# Altium PCB PCB1.PcbDoc
Units mm, origin at the board's own origin, x right, y up, seen from the top; angles counter-clockwise.
Board outline 50 x 20 mm, 4 copper layers (L1, L2, L3, L4), stack 1.564 mm thick; 42 components, 36 nets, 161 pads, 147 vias.
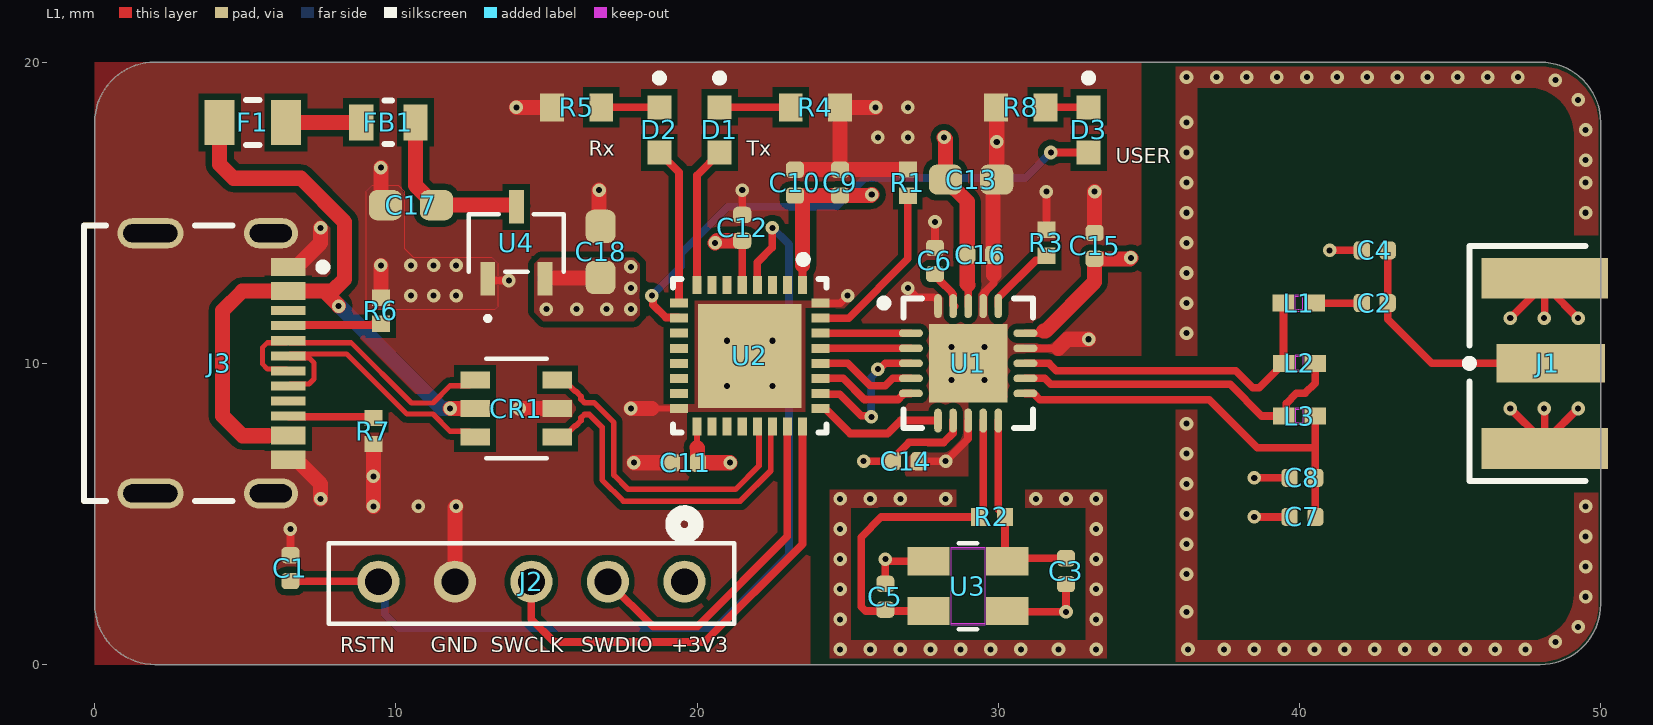
[diagram p0: L1 view]
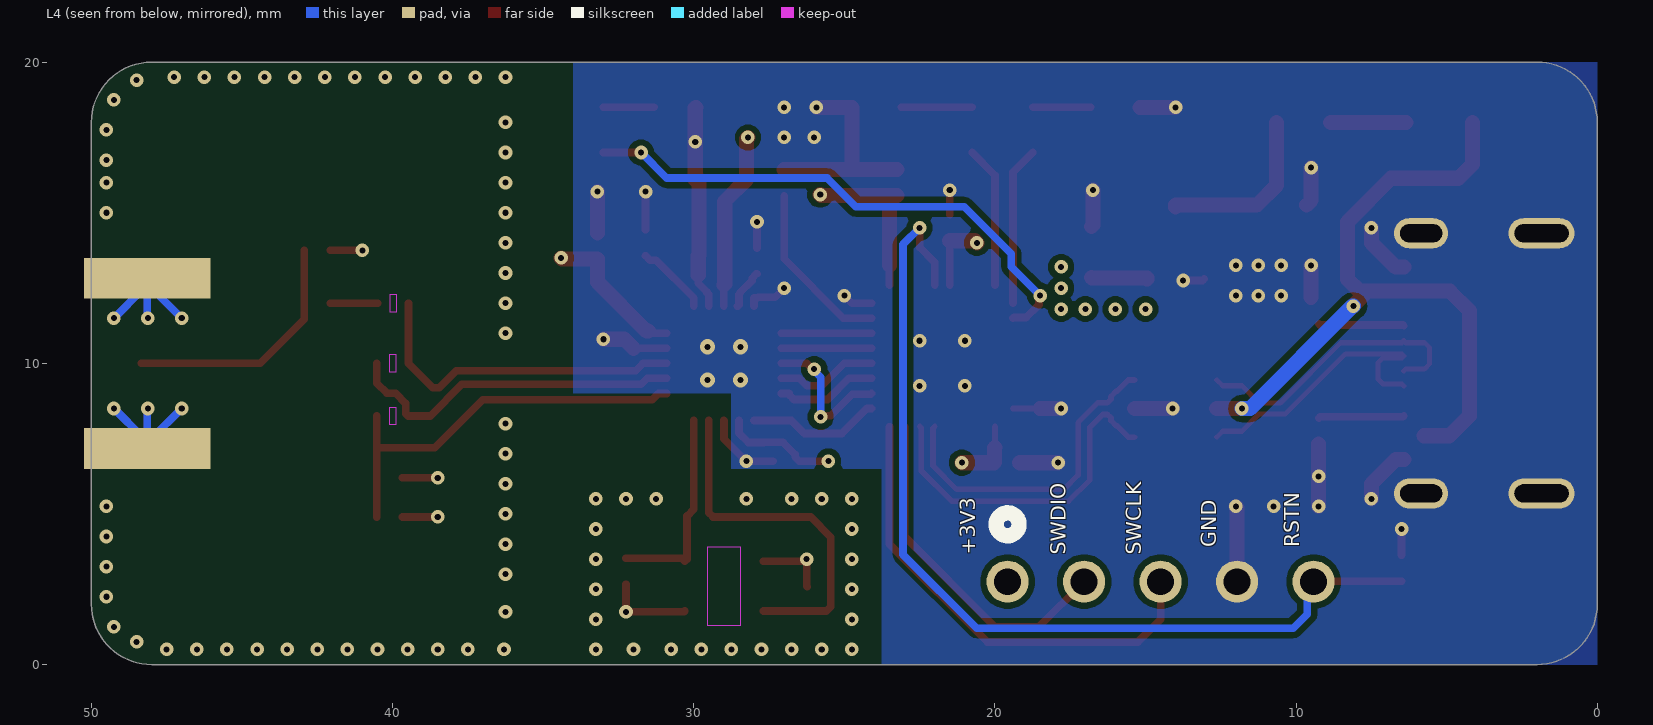
[diagram p1: L4 view, seen from below]
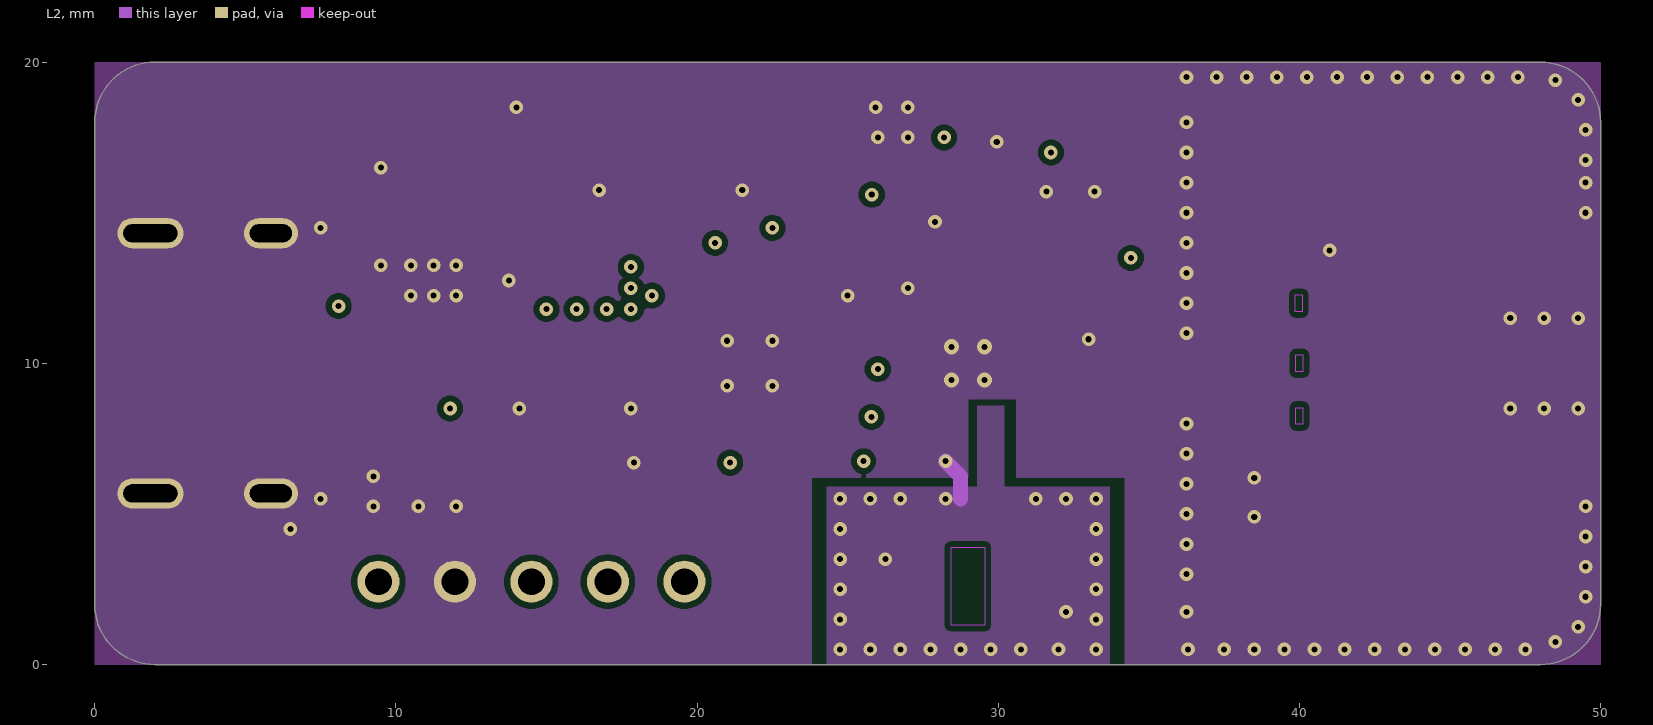
[diagram p2: L2]
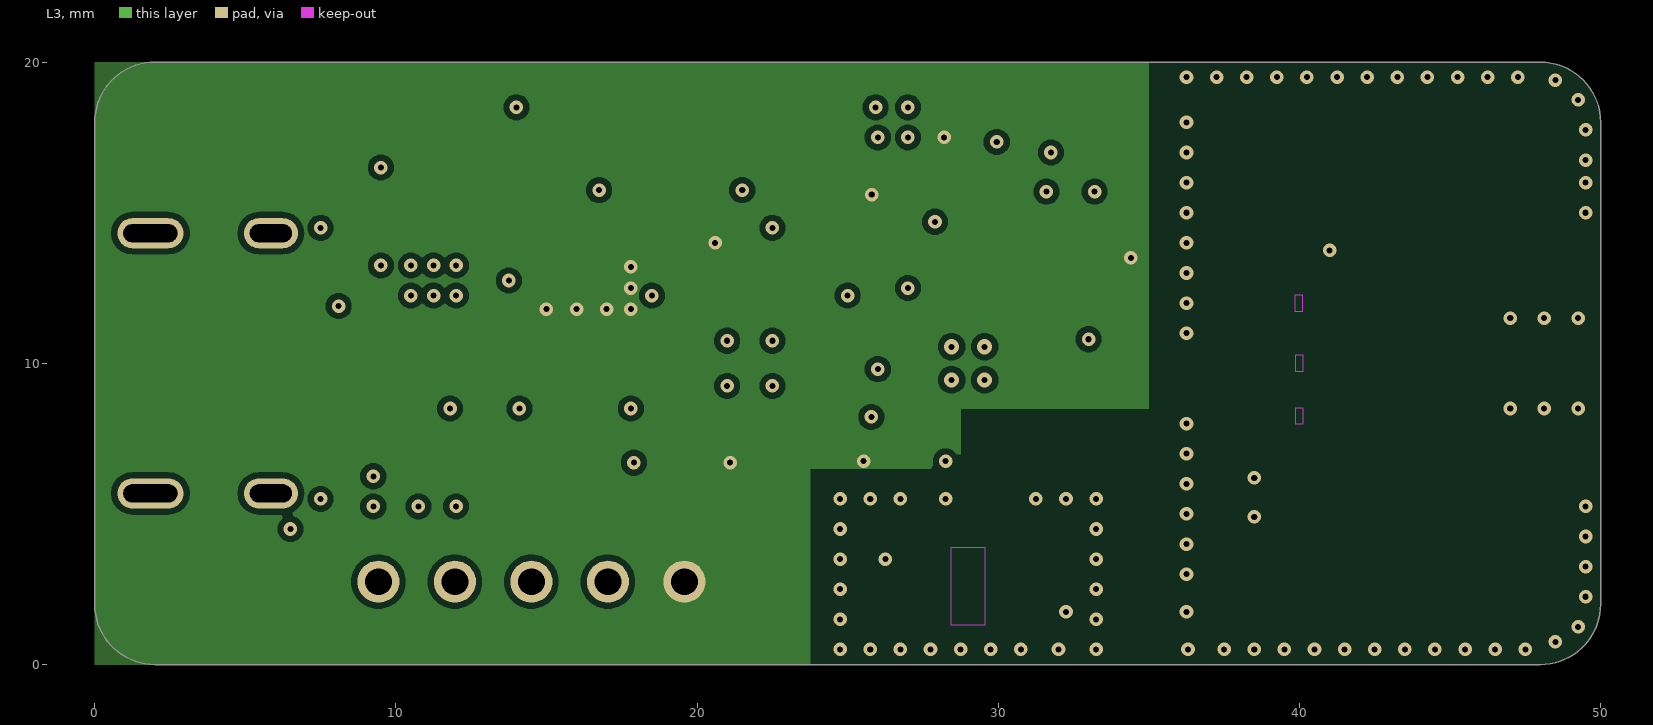
[diagram p3: L3]
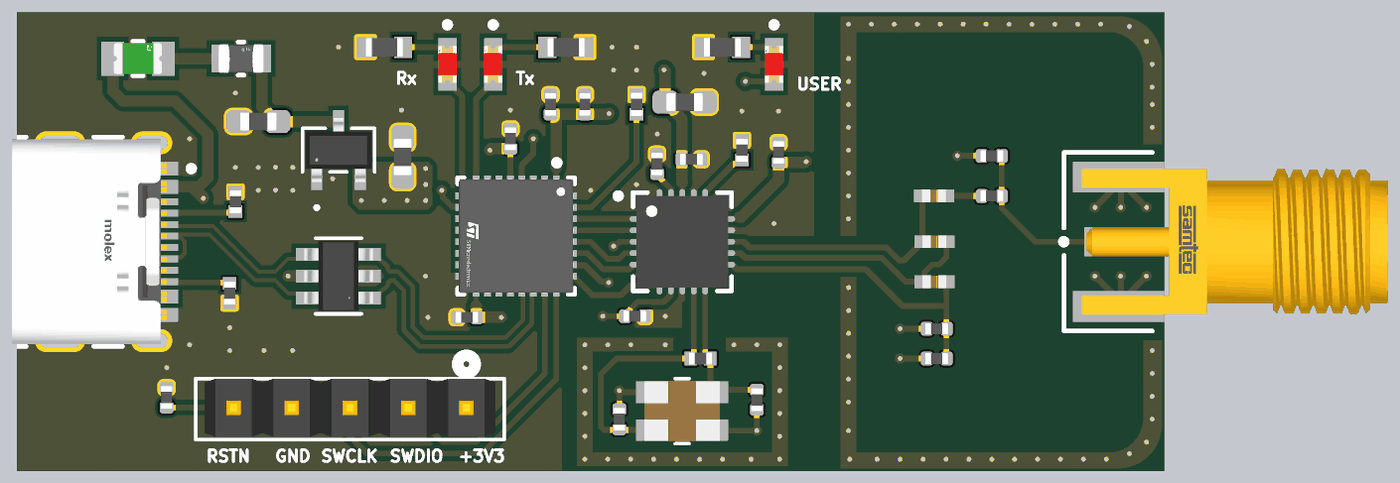
[diagram p4: 3D render of the assembled board from above, using the file's embedded part models]

## Layer stack, top to bottom
Top Solder: solder mask 0.0102, Solder Resist, Dk 3.5
L1: signal copper 0.035
Dielectric 2: prepreg 0.0994, PP-006, Dk 4.1
L2: signal copper 0.0152
Dielectric 1: dielectric 1.265, FR-4, Dk 4.5
L3: signal copper 0.0152
Dielectric 3: prepreg 0.0994, PP-006, Dk 4.1
L4: signal copper 0.035
Bottom Solder: solder mask 0.0102, Solder Resist, Dk 3.5

## Board outline
2,0 cw(c2,2) 0,2 0,18 cw(c2,18) 2,20 48,20 cw(c48,18) 50,18 50,2 cw(c48,2) 48,0

## Design rules (kind name [scope] priority, off if disabled: settings)
Clearance [All] p1: gap=0.2 ignorepadtopadclearanceinfootprint=FALSE
DiffPairsRouting DiffPairsRouting_90R [InDifferentialPair('USB_CONN_D') OR InDifferentialPair('USB_D')] p1: maxlimit=0.22 minlimit=0.18 mostfreqgap=0.2 toplayer_minwidth=0.14 toplayer_maxwidth=0.19 toplayer_prefwidth=0.169 midlayer1_minwidth=0.14 midlayer1_maxwidth=0.19 midlayer1_prefwidth=0.169 midlayer2_minwidth=0.14 midlayer2_maxwidth=0.19 midlayer2_prefwidth=0.169 bottomlayer_minwidth=0.14 bottomlayer_maxwidth=0.19 bottomlayer_prefwidth=0.169 maxuncoupledlength=12.7
DiffPairsRouting [All] p2: maxlimit=0.254 minlimit=0.254 mostfreqgap=0.254 toplayer_minwidth=0.381 toplayer_maxwidth=0.381 toplayer_prefwidth=0.381 midlayer1_minwidth=0.381 midlayer1_maxwidth=0.381 midlayer1_prefwidth=0.381 midlayer2_minwidth=0.381 midlayer2_maxwidth=0.381 midlayer2_prefwidth=0.381 bottomlayer_minwidth=0.381 bottomlayer_maxwidth=0.381 bottomlayer_prefwidth=0.381 maxuncoupledlength=12.7
MinimumSolderMaskSliver [All] p1: minsoldermaskwidth=0.1
PolygonConnect [All] p1: connectstyle=Direct reliefconductorwidth=0.254 reliefentries=4 polygonreliefangle="90 Angle" airgapwidth=0.254
RoutingVias [All] p1: holewidth=0.2 width=0.45 viastyle="Through Hole" minholewidth=0.2 minwidth=0.45 maxholewidth=0.2 maxwidth=0.45
SolderMaskExpansion [All] p1: expansion=0.102 istentingtop=FALSE
Width [All] p1: maxlimit=0.5 minlimit=0.15 preferedwidth=0.254 minimp=50.000000 maximp=50.000000 favimp=50.000000
28 further rules are at their usual default settings.

## Classes and differential pairs
differential pair USB_D: +USB_D_P -USB_D_N
differential pair USB_CONN_D: +USB_CONN_D_P -USB_CONN_D_N

## Components (designator, comment, footprint, x,y, rotation, side; value= is the part's Value field where it differs from the comment)
C1 "100nF" CAPC1005X55N 6.5,3.2 r90 top
C2 "1.5pF" CAPC1005X55N 42.5,12 r0 top
C3 "12pF" CAPC1005X55N 32.25,3.1 r270 top
C4 "1.0pF" CAPC1005X55N 42.5,13.75 r0 top
C5 "12pF" CAPC1005X55N 26.25,2.25 r90 top
C6 "33nF" CAPC1005X55N 27.9,13.4 r270 top
C7 "2.2nF" CAPC1005X55N 40.1,4.9 r0 top
C8 "4.7pF" CAPC1005X55N 40.1,6.2 r0 top
C9 "1uF" CAPC1005X55N 24.75,16 r270 top
C10 "100nF" CAPC1005X55N 23.25,16 r270 top
C11 "100nF" CAPC1005X55N 19.6,6.7 r0 top
C12 "100nF" CAPC1005X55N 21.5,14.5 r270 top
C13 "10uF" CAPC1608X90 29.1,16.1 r180 top
C14 "10nF" CAPC1005X55N 26.93,6.75 r180 top
C15 "10nF" CAPC1005X55N 33.2,13.9 r270 top
C16 "10nF" CAPC1005X55N 29.4,13.6 r180 top
C17 "10uF" CAPC1608X90 10.5,15.25 r0 top
C18 "10uF" CAPC1608X90 16.8,13.7 r270 top
CR1 "USBLC6-2SC6" SOT23-6L_STM 14,8.5 r180 top
D1 "SML-LX0603IW-TR" FP-SML-LX0603IW-TR-MFG 20.75,17.75 r270 top
D2 "SML-LX0603IW-TR" FP-SML-LX0603IW-TR-MFG 18.75,17.75 r270 top
D3 "SML-LX0603IW-TR" FP-SML-LX0603IW-TR-MFG 33,17.75 r270 top
F1 "0805L010YR" FP-0805L010-MFG 5.25,18 r0 top
FB1 "MPZ2012S101AT000" FP-MPZ2012-MFG 9.75,18 r0 top
J1 "SMA-J-P-H-ST-EM1" FP-SMA-J-P-H-ST-EM1-MFG 55,10 r90 top
J2 "TSW-105-07-G-S" CON5_1X5_TU_TSW 14.5,2.75 r180 top
J3 "217179-0001" FP-2171790001-MFG 3,10 r270 top locked
L1 "3.9nH" IND_LQG15HS3N3S02D_MUR 39.979,12 r180 top
L2 "8.2nH" IND_LQG15HS3N3S02D_MUR 40,10 r180 top
L3 "2.7nH" IND_LQG15HS3N3S02D_MUR 40,8.25 r180 top
R1 "10K" RESC1005X37N 27,16 r90 top
R2 "1M" RESC1005X37N 29.791,4.9 r0 top
R3 "22K" RESC1005X37N 31.6,14 r270 top
R4 "1K" RESC1608X55N 23.93,18.5 r180 top
R5 "1K" RESC1608X55N 16,18.5 r0 top
R6 "5K1" RESC1005X37N 9.5,11.75 r90 top
R7 "5K1" RESC1005X37N 9.25,7.75 r270 top
R8 "1K" RESC1608X55N 30.75,18.5 r0 top
U1 "NRF24L01P-T" NRSC-QFN-20_N 29,10 r0 top
U2 "STM32L432KBU6" FP-UFQFPN32-A0B8-MFG 21.75,10.25 r270 top
U3 "X322516MLB4SI  16MHz" CHIP_X32B4SI_SYX 28.991,2.6 r180 top
U4 "XC6206P332MR-G" SOT-23_TOR 14,14 r0 top

## Footprints (in the part's own frame and the unit in brackets; to place one, negate y for a bottom-side part, rotate by r counter-clockwise, add the part's x,y. Pads: shape width x height; smd on the part's side, far side on the other; paste and mask are expansions set on the pad)
CAPC1005X55N [mm]
  rrect53% 0.54x0.6 smd paste+0 mask+0.102: 1(-0.43,0) 2(0.43,0)
  body extent -0.5,-0.25 0.5,0.25, height 0.55
CAPC1608X90 [mm]
  rrect53% 1.1x1 smd: 1(-0.85,0) 2(0.85,0)
  body extent -0.8,-0.4 0.8,0.4, height 0.9
CHIP_X32B4SI_SYX [mil]
  rect 55x37 smd paste+0 mask+0: 1(-51.5,-32.48) 2(51.5,-32.48) 3(51.5,32.48) 4(-51.5,32.48)
  L1 keep-out region: -22,-49 -22,49 22,49 22,-49
  Keep-Out Layer region: -22,-51 -22,51 22,51 22,-51
  silkscreen extent -12,-56 12,56, body extent -65,-52 65,52, height 32
CON5_1X5_TU_TSW [mil]
  round 55 hole 35 paste-27.5 mask+0: 1(-200,0) 2(-100,0) 3(0,0) 4(100,0) 5(200,0)
  silkscreen extent -265,-90 265,55, body extent -250,-50 250,50, height 500
FP-0805L010-MFG [mm]
  rect 1x1.5 smd paste+0 mask+0: 1(-1.1,0) 2(1.1,0)
  silkscreen extent -0.23,-0.75 0.23,0.75, body extent -1.7,-0.85 1.7,0.85, height 0.25
FP-2171790001-MFG [mm]
  rrect100% 1x1.8 hole 1.4 slot 0.6 at 0 deg paste-1000 mask+0: 1(-4.32,2.85) 2(4.32,2.85)
  rrect100% 1x2.2 hole 1.8 slot 0.6 at 0 deg paste-1000 mask+0: 3(-4.32,-1.15) 4(4.32,-1.15)
  rect 0.6x1.15 smd paste+0 mask+0: A1-B12(-3.2,3.425) A4-B9(-2.4,3.425) B1-A12(3.2,3.425) B4-A9(2.4,3.425)
  rect 0.3x1.15 smd paste+0 mask+0: A5(-1.25,3.425) A6(-0.25,3.425) A7(0.25,3.425) A8(1.25,3.425) B5(1.75,3.425) B6(0.75,3.425) B7(-0.75,3.425) B8(-1.75,3.425)
  silkscreen extent -4.57,-3.35 4.57,4.7, body extent -4.92,-3.45 4.92,4.1, height 0.25
FP-MPZ2012-MFG [mm]
  rect 0.8x1.2 smd paste+0 mask+0: 1(-0.9,0) 2(0.9,0)
  silkscreen extent -0.13,-0.72 0.13,0.72, body extent -1.4,-0.82 1.4,0.82, height 0.25
FP-SMA-J-P-H-ST-EM1-MFG [mm]
  rect 1.27x3.6 smd paste+0 mask+0: 1(0,6.66)
  rect 1.35x4.2 smd paste+0 mask+0: 2(-2.825,6.86) 3(2.825,6.86)
  rect 1.35x4.2 smd far side paste+0 mask+0: 4(-2.825,6.86) 5(2.825,6.86)
  silkscreen extent -3.9,5.5 3.9,9.48, body extent -3.6,-4.92 3.6,9.06, height 0.25
FP-SML-LX0603IW-TR-MFG [mm]
  rect 0.8x0.8 smd paste+0 mask+0: 1(-0.75,0) 2(0.75,0)
  silkscreen extent -1.85,-0.12 -1.6,0.13, body extent -1.25,-0.63 1.25,0.63, height 0.25
FP-UFQFPN32-A0B8-MFG [mm]
  rect 0.6x0.3 smd paste+0 mask+0: 1(-2.35,1.75) 2(-2.35,1.25) 3(-2.35,0.75) 4(-2.35,0.25) 5(-2.35,-0.25) 6(-2.35,-0.75) 7(-2.35,-1.25) 8(-2.35,-1.75) 17(2.35,-1.75) 18(2.35,-1.25) 19(2.35,-0.75) 20(2.35,-0.25) 21(2.35,0.25) 22(2.35,0.75) 23(2.35,1.25) 24(2.35,1.75)
  rect 0.3x0.6 smd paste+0 mask+0: 9(-1.75,-2.35) 10(-1.25,-2.35) 11(-0.75,-2.35) 12(-0.25,-2.35) 13(0.25,-2.35) 14(0.75,-2.35) 15(1.25,-2.35) 16(1.75,-2.35) 25(1.75,2.35) 26(1.25,2.35) 27(0.75,2.35) 28(0.25,2.35) 29(-0.25,2.35) 30(-0.75,2.35) 31(-1.25,2.35) 32(-1.75,2.35)
  rect 3.45x3.45 smd paste+0 mask+0: 33(0,0)
  silkscreen extent -3.32,-2.55 2.55,2.55, body extent -2.75,-2.75 2.75,2.75, height 0.25
IND_LQG15HS3N3S02D_MUR [mil]
  rect 28x22 smd paste+0 mask+0: 1(-20.5,0) 2(20.5,0)
  L1 keep-out region: -4.5,-9 -4.5,9 4.5,9 4.5,-9
  Keep-Out Layer region: -4.5,-11 -4.5,11 4.5,11 4.5,-11
  body extent -21,-11 21,11, height 22
NRSC-QFN-20_N [mm] "QFN, 20-Leads, Body 4x4mm, Pitch 0.5mm, Thermal Pad 2.6x2.6mm, IPC Medium Density"
  oval 0.8x0.25 smd mask-0.005: 1(-1.9,1) 2(-1.9,0.5) 3(-1.9,0) 4(-1.9,-0.5) 5(-1.9,-1) 11(1.9,-1) 12(1.9,-0.5) 13(1.9,0) 14(1.9,0.5) 15(1.9,1)
  oval 0.25x0.8 smd mask-0.005: 6(-1,-1.9) 7(-0.5,-1.9) 8(0,-1.9) 9(0.5,-1.9) 10(1,-1.9) 16(1,1.9) 17(0.5,1.9) 18(0,1.9) 19(-0.5,1.9) 20(-1,1.9)
  rect 2.6x2.6 smd: 21(0,0)
  silkscreen extent -2.92,-2.15 2.15,2.15, body extent -2,-2 2,2, height 0.95
RESC1005X37N [mm]
  rect 0.54x0.6 smd paste+0 mask+0.102: 1(-0.432,0) 2(0.432,0)
  body extent -0.5,-0.25 0.5,0.25, height 0.37
RESC1608X55N [mm]
  rect 0.79x0.93 smd paste+0 mask+0.102: 1(-0.82,0) 2(0.82,0)
  body extent -0.8,-0.4 0.8,0.4, height 0.55
SOT23-6L_STM [mil]
  rect 38.5x22 smd paste+0 mask+0: 1(-53.75,37.4) 2(-53.75,0) 3(-53.75,-37.4) 4(53.75,-37.4) 5(53.75,0) 6(53.75,37.4)
  silkscreen extent -40,-65 40,65, body extent -59,-60 59,60, height 57
SOT-23_TOR [mil]
  rect 19.36x43.56 smd paste+0 mask+0: 1(-37.4,-47) 2(37.4,-47) 3(0,47)
  silkscreen extent -62,-102 62,38, body extent -57,-55 57,55, height 51

## Part data
C1 C10 C11 C12: library part CAP-0402-100NF, "Chip Capacitor, 100 nF", Case Size/Dimension=0402, LCSC Part #=C1525, Capacitance=100nF
C2: library part CAP-0402-1P5F, "Chip Capacitor, 1.5 pF", Capacitance=1P5F, Case Size/Dimension=0402, LCSC Part #=C76901
C3 C5: library part CAP-0402-12PF, "Chip Capacitor, 12 pF", Case Size/Dimension=0402, LCSC Part #=C2235030, Capacitance=12pF
C4: library part CAP-0402-1PF, "Chip Capacitor, 1.0 pF", Capacitance=1pF, Case Size/Dimension=0402, LCSC Part #=C76898
C6: library part CAP-0402-33NF, "Chip Capacitor, 33 nF", Case Size/Dimension=0402, LCSC Part #=C126535, Capacitance=33nF
C7: library part CAP-0402-2N2F, "Chip Capacitor, 2.2 nF", Capacitance=2N2F, Case Size/Dimension=0402, LCSC Part #=C2987940
C8: library part CAP-0402-4P7F, "Chip Capacitor, 4.7 pF", Capacitance=4P7F, Case Size/Dimension=0402, LCSC Part #=C161327
C9: library part CAP-0402-1UF, "Chip Capacitor, 1 uF", Case Size/Dimension=0402, LCSC Part #=C52923, Capacitance=1uF
C13 C17 C18: library part CAP-0603-10UF, "Chip Capacitor, 10 uF", Case Size/Dimension=0603, LCSC Part #=C22418930, Capacitance=10uF
C14 C15 C16: library part CAP-0402-10NF, "Chip Capacitor, 10 nF", Case Size/Dimension=0402, LCSC Part #=C15195, Capacitance=10nF
CR1: "ESD Protection for USB 2.0 High Speed", LCSC Part #=C5261088, Manufacturer_Name=STMicroelectronics, Copyright="Copyright (C) 2025 Ultra Librarian. All rights reserved.", Manufacturer_Part_Number=USBLC6-2SC6, RefDes=RefDes
D1 D2 D3: "LED RED DIFFUSED SMD", Case Code (Imperial)=0603, Case Code (Metric)=1608, Color=Red, Forward Current=20mA, Forward Voltage=2V, LCSC Part #=C5354817, Lens Color=White, Max Operating Temperature=85°C, Min Operating Temperature=-25°C, Package Quantity=1, Power Dissipation=50mW, Approvals=UL, Case/Package=0603, Diameter=0.061inch, Dominant Wavelength=635nm, Height=0.6mm, Illumination Color=Red, Lead Free="Lead Free", Length=1.6mm, Lens Style=Diffused, Lens Transparency=Diffused, Luminous Intensity=14mcd, Mount="Surface Mount", Number of LEDs=1, Number of Pins=2, Packaging="Tape and Reel", RoHS Compliant=Yes, Test Current=20mA, Viewing Angle=160°, Wavelength=635nm, Width=0.8mm
F1: "0805L010YR PTC Resettable Fuse 0.1A(hold) 0.3A(trip) 15VDC 100A 0.5W 1.5s 1Ohm SMD Solder Pad 0805 T/R", Ambient Temperature Range High=85°C, Case Code (Imperial)=0805, Case Code (Metric)=2012, Current Rating=100A, Hold Current=100mA, LCSC Part #=C207020, Max Power Dissipation=500mW, Max Voltage Rating (DC)=15V, Maximum Resistance 1 Hour (R1max)=6Ω, Min Operating Temperature=-40°C, Minimum Resistance Initial (Rmin)=1Ω, Trip Current=300mA, Approvals="TUV, cULus", Case/Package=0805, Height=1mm, Lead Free="Lead Free", Length=2.2mm, Lifecycle Status=Production, Max Current Rating=100A, Max Operating Temperature=85°C, Mount="Surface Mount", NexarPartId=673855, Operating Supply Voltage=15V, Packaging="Cut Tape", Power Dissipation=500mW, REACH SVHC="No SVHC", Resistance=6Ω, RoHS=Compliant, Terminal Material=Copper, Termination=SMD/SMT, Time to Trip=1.5s, Voltage Rating=15V, Voltage Rating (DC)=15V, Width=1.5mm, Working Voltage=15V
FB1: "FERRITE BEAD 100 OHM 0805 1LN", Case Code (Imperial)=0805, Case Code (Metric)=2012, Current Rating=4A, DC Resistance (DCR)=20mR, LCSC Part #=C15957, Max Operating Temperature=125°C, Min Operating Temperature=-55°C, Package Quantity=4000, Test Frequency=100MHz, Tolerance=25%, Case/Package=0805, Height=0.041inch, Impedance=100R, Lead Free="Lead Free", Length=0.079inch, Max DC Current=4A, Mount="Surface Mount", Packaging="Tape and Reel", REACH SVHC="No SVHC", RoHS Compliant=Yes, Termination=SMD/SMT, Weight=0.000194oz, Width=0.049inch
J1: "CONN SMA JACK STR 50OHM EDGE MNT", Case/Package=SMA, Dielectric Material=PTFE, Housing Color=Gold, LCSC Part #=C5199907, Max Frequency=6GHz, Max Operating Temperature=125°C, Min Operating Temperature=-65°C, Package Quantity=1, Voltage Rating=335V, Body Material=Brass, Body Plating=Gold, Center Contact Plating=Gold, Connector Type=SMA, Contact Material=Copper, Contact Plating=Gold, Depth=13.33mm, Fastening Type=Threaded, Impedance=50R, Insulation Material=Polytetrafluoroethylene, Length=6.35mm, Mount=Edge, Orientation=Straight, Packaging=Tray, Radiation Hardening=No, RoHS Compliant=Yes, Series=SMA, Termination=Solder
J2: "Conn Unshrouded Header HDR 5 POS 2.54mm Solder ST Top Entry Thru-Hole Bag", LCSC Part #=C5993812, Manufacturer_Name="Samtec Inc", Copyright="Copyright (C) 2025 Ultra Librarian. All rights reserved.", Manufacturer_Part_Number=TSW-105-07-G-S, RefDes=RefDes, Type=Type
J3: "CONN RCP USB2.0 TYP C 24P SMD RA", Current Rating=1.25A, LCSC Part #=C3197684, Max Operating Temperature=85°C, Min Operating Temperature=-40°C, Voltage Rating=30V, Contact Material="Gold, Nickel", Gender=Receptacle, Height=3.36mm, NexarPartId=117190526, Number of Contacts=16, USB Standard="USB 2.0"
L1: library part "IND SMD 3.9nH", "Inductor SMD", LCSC Part #=C77109, Copyright="Copyright (C) 2026 Ultra Librarian. All rights reserved."
L2: library part "IND SMD 8.2nH", "Inductor SMD", LCSC Part #=C98003, Copyright="Copyright (C) 2026 Ultra Librarian. All rights reserved."
L3: library part "IND SMD 2.7nH", "Inductor SMD", LCSC Part #=C77108, Copyright="Copyright (C) 2026 Ultra Librarian. All rights reserved."
R1: library part RES-0402-10K, "RES 10kΩ ±1% 62.5mW 0402", Case/Package=0402, LCSC Part #=C60490, Resistance=10kR, Composition="Thin Film"
R2: library part RES-0402-1M, "RES 1MΩ ±1% 62.5mW 0402", Case/Package=0402, LCSC Part #=C2906900, Resistance=1MR, Composition="Thin Film"
R3: library part RES-0402-22K, "RES 22kΩ ±1% 62.5mW 0402", Case/Package=0402, LCSC Part #=C82868, Resistance=22kR, Composition="Thin Film"
R4 R5 R8: library part RES-0603-1K, "RES 1KΩ ±1% 62.5mW 0603", Case/Package=0603, LCSC Part #=C2907002, Resistance=1KR, Composition="Thin Film"
R6 R7: library part RES-0402-5K1, "RES 5K1Ω ±1% 62.5mW 0402", Case/Package=0402, LCSC Part #=C723526, Resistance=5K1R, Composition="Thin Film"
U1: "Single Chip Transceiver, 2.4 GHz, 60 mW, 1.9 to 3.6 V, -40 to 85 degC, 20-Pin QFN, RoHS, Tray", Current - Receiving=12.6mA~13.5mA, Current - Transmitting=7mA~11.3mA, Frequency=2.4GHz, LCSC Part #=C1526140, Manufacturer="Nordic Semiconductor", Operating Temperature=-40°C~85°C, Package / Case=20-VFQFNExposedPad, Package Description="20-Pin Quad Flat No-lead Package, Body 4 x 4 mm, Pitch 0.5 mm", Package Reference=QFN20, Power - Output=0dBm, Standard Package=490, Voltage - Supply=1.9V~3.6V, Category=RF/IFandRFID, Data Rate (Max)=2Mbps, Datasheet URL=http://www.nordicsemi.com/eng/content/download/2726/34069/file/nRF24L01P_Product_Specification_1_0.pdf, Datasheet Version="Rev. 1.0, 09/2008", Design Resources=DevelopmentToolSelector, Family=RFTransceiverICs, For Use With=1490-1002-ND-KITEVALUATIONNRF24L01P1568-1295-ND-SPARKFUNTRANSCEIVERBREAKOUT-1568-1296-ND-SPARKFUNTRANSCEIVERBREAKOUT-1471-1410-ND-DEVBOARDNRFSCLICKNRF24L01P-MODULE-PCB-ND-KITEVALNRF24L01+PCBANTENNANRF24L01P-MODULE-SMA-ND-KITEVALNRF24L01+SMACONNNRF24L01P-UPGRADE-ND-UPGRADE2PCB/1SMANRF24L01103990038-ND-DEVDUINOSENSORNODEV1.3103990053-ND-DEVDUINOSENSORNODEV2(ATMEGA103990074-ND-DEVDUINOSENSORNODE106990026-ND-ENERGYMONITORSHIELDV2113990088-ND-WIRELESSGATESHIELD113990095-ND-DEVDUINOSENSORNODEV3(ATMEGA106030001-ND-ENERGYMONITORSHIELD1597-1361-ND-DEVDUINOSENSORNODEV2.2(ATMEG105990030-ND-RGBWSTRIPWIRELESSSHIELDV1.0, GPIO=-, Manufacturer URL=http://www.nordicsemi.com/eng/Products/, Memory Size=-, Modulation=GFSK, Mounting Technology=SurfaceMount, Online Catalog=nRF24L01+, Other Names=1490-1019, Packaging=Tray, Protocol=-, RF Family/Standard=GeneralISM>1GHZ, Sensitivity=-94dBm, Serial Interfaces=SPI, Series=-, Type=TxRxOnly
U2: "IC MCU 32BIT 128KB FLASH 32QFPN", Ambient Temperature Range High=+85°C, Ambient Temperature Range Low=-40°C, Frequency=80MHz, LCSC Part #=C94784, Manufacturer=STMicroelectronics, Max Junction Temp=+105°C, Max Supply Voltage=3.6V, Min Supply Voltage=1.62V, Package=UFQFPN32-A0B8, Temperature="-40°C to +85°C", Automotive=No, Category=IC, ComponentLink2Description=Datasheet, ComponentLink2URL=https://www.st.com/resource/en/datasheet/stm32l432kb.pdf, Core Architecture="ARM Cortex-M4", Data Bus Width=32bits, Device Class L1="Integrated Circuits (ICs)", Device Class L2="Embedded Processors and Controllers", Device Class L3=Microcontrollers, Digikey Description="IC MCU 32BIT 128KB FLASH 32QFPN", Height=0.6mm, Interface=I2C,SPI,UART,USART,USB,IrDA, Ipc Land Pattern Name=QFN50P500X500X55-32, Lead Free=Yes, Manufacturer Part Number=STM32L432KBU6, Memory Size=128KBytes, Memory Type=FLASH, Number Of A/D Converters=1, Number Of Adc Channels=10, Number Of Cores=1, Number Of I2C Channels=2, Number of I/Os=26, Number Of Spi Channels=2, Number Of Timers/Counters=8, Number Of Uart Channels=1, Octopart=https://octopart.com/stm32l432kbu6-stmicroelectronics-74568735, RAM Size=64KBytes, RoHS=TRUE, Temperature Range High=+85°C, Temperature Range Low=-40°C
U3: library part X322516MLB4SI, "CRYSTAL 16MHz 9pF SMD", LCSC Part #=C13738, Manufacturer_Name="Shenzhen Yang Xing Technology", Copyright="Copyright (C) 2025 Ultra Librarian. All rights reserved.", Manufacturer_Part_Number=X322516MLB4SI, RefDes=RefDes, Type=Type
U4: "Low ESR Cap. Compatible Positive Voltage Regulators", LCSC Part #=C5446, Manufacturer_Name="Torex Semiconductor", Copyright="Copyright (C) 2026 Ultra Librarian. All rights reserved.", Manufacturer_Part_Number=XC6206P332MR-G, RefDes=RefDes, Type=Type

## Via types
v1: diameter 0.45, hole 0.2, L1 to L4, tented both sides, 143 vias
v2: diameter 0.5, hole 0.2, L1 to L4, 4 vias

## Nets (pads, with @x,y where several pads share a name; then routed paths per layer and width w, separated by ;. In a path a pad name is that pad's centre, name@x,y a point inside that pad or via, vN(x,y) a via of type N, cw(c..) or ccw(c..) an arc to the next point about the centre after c; other vN are vias at no path point)
+3V3: C9.2 C10.2 C11.2 C12.2 C13.2 C14.2 C15.2 C16.2 C18.2 J2.1 U1.7 U1.15 U1.18 U2.1 U2.5 U2.17 U4.2 | length 26.5
  L1 w0.2: 20,7.2 U2.17
  L1 w0.254: U2.5 C12.2 ; U2.1 23.5,13.25 ; v1(25.53,6.75) C14.2 26.633,6.883 26.633,6.972 27.038,7.377 27.682,7.377 27.686,7.373 28.187,7.373 28.498,7.684 28.498,8.098 U1.7 ; U1.18 29,12.6 ; U1.15 31.425,11 31.5,11.075
  L1 w0.5: U4.2 14.95,12.824 14.954,12.828 16.778,12.828 C18.2 ; 20,7.2 20.01,7.19 20.01,6.72 C11.2 v1(21.1,6.7) ; v1(20.6,14) 20.67,14.07 C12.2 ; C10.2 C9.2 25.77,15.57 v1(25.8,15.6) ; 23.5,13.25 23.5,15.32 ; v1(28.2,17.5) 28.25,17.45 C13.2 28.97,15.38 C16.2 ; C16.2@28.97,13.55 28.97,12.63 29,12.6 ; 31.5,11.075 31.575,11.075 33.2,12.7 C15.2 34.37,13.47 v1(34.4,13.5)
  other v1: 15,11.8 16,11.8 17,11.8 17.8,11.8 17.8,12.5 17.8,13.2
+5V: CR1.5 F1.1 J3.A4-B9 J3.B4-A9 | length 24.6
  L1 w0.5: F1.1 4.15,16.6 4.605,16.145 6.845,16.145 8.293,14.697 8.293,12.793 7.9,12.4 7.625,12.4 ; 5.75,7.596 4.904,7.596 4.25,8.25 4.25,11.75 4.896,12.396 6.421,12.396 J3.A4-B9 7.625,12.4 ; v1(8.1,11.9) 8.1,11.925 7.763,12.262 7.625,12.4 ; v1(11.8,8.5) CR1.5
  L4 w0.5: v1(8.1,11.9) 8.125,11.9 11.525,8.5 v1(11.8,8.5)
GND: C1.2 C3.2 C4.1 C5.2 C6.1 C7.1 C8.1 C9.1 C10.1 C11.1 C12.1 C13.1 C14.1 C15.1 C16.1 C17.1 C18.1 CR1.2 J1.2 J1.3 J1.4 J1.5 J2.4 J3.1 J3.2 J3.3 J3.4 J3.A1-B12 J3.B1-A12 R1.2 R3.1 R4.1 R5.1 R6.2 R7.2 R8.1 U1.8 U1.14 U1.17 U1.20 U1.21 U2.16 U2.32 U2.33 U3.2 U3.4 U4.1 | length 73.1
  L1 w0.2: 18.5,8.5 U2.16
  L1 w0.254: C1.2 v1(6.5,4.5) ; v1(9.5,16.5) v1@9.538,16.462 ; U4.1 13.106,12.75 v1(13.75,12.75) ; C12.1 v1(21.5,15.75) ; U2.32 24.75,12 v1(25,12.25) ; C5.2@26.226,2.577 26.25,2.601 C5.2 v1(26.25,3.5) 26.303,3.5 26.378,3.425 U3.2 ; v1(27,12.5) 27.3,12.2 27.851,12.2 27.878,12.173 27.998,12.173 28,12.171 U1.20 ; C14.1 v1(28.25,6.75) 28.998,7.498 28.998,8.098 U1.8 ; C6.1 v1(27.9,14.7) ; U1.17 29.502,11.902 29.502,12.286 29.562,12.346 29.562,12.376 29.85,12.664 29.85,12.936 ; U3.4 30.324,1.75 v1(32.25,1.75) C3.2 ; U1.14 31.259,10.5 31.261,10.498 31.814,10.498 31.816,10.5 32,10.5 ; R3.1 v1(31.6,15.7) ; v1(38.5,4.9) C7.1 ; v1(38.5,6.2) C8.1 ; v1(41,13.75) C4.1 ; v1(47,8.5) J1.2@48.009,7.491 ; v1(47,11.5) 48.009,12.509 ccw(c47.693,12.825) J1.3 ; v1(48.125,11.5) ccw(c48.089,11.536) 48.14,11.536 J1.3 ; J1.2 v1@48.14,8.464 ; J1.2@48.292,7.542 v1(49.25,8.5) ; v1(49.25,11.5) 48.292,12.458 cw(c48.659,12.825) J1.3
  L1 w0.5: J3.B1-A12 6.7,6.8 7.5,6 v1(7.5,5.5) ; J3.A1-B12 6.7,13.2 7.5,14 v1(7.5,14.5) ; v1(9.25,5.25) v1(9.25,6.25) R7.2 ; R6.2 v1(9.5,13.25) ; v1(9.5,16.5) 9.5,15.4 C17.1 ; J2.4 11.96,5.21 v1(12,5.25) ; v1(14,18.5) R5.1 ; v1(14.1,8.5) CR1.2 ; v1(16.75,15.75) 16.75,14.6 C18.1 ; v1(17.8,8.5) 18.5,8.5 ; v1(17.9,6.7) C11.1 C11.1@19.19,6.7 ; C10.1 C10.1 C9.1 ; v1(25.93,18.5) R4.1 C9.1 ; R1.2 R1.2 C9.1 ; C13.1@29.83,16.1 C16.1 29.85,13.58 29.85,12.936 ; R8.1 29.95,18.48 v1(29.95,17.35) C13.1 ; 32,10.5 32.3,10.8 v1(33,10.8) ; C15.1 v1(33.2,15.7)
  L2 w0.5: v1(28.25,6.75) 28.75,6.25 28.75,5.5
  L4 w0.254: v1(47,8.5) 48.009,7.491 cw(c47.693,7.175) J1.4 ; v1(47,11.5) 48.009,12.509 ccw(c47.693,12.825) J1.5 ; v1(48.125,8.5) cw(c48.089,8.464) 48.14,8.464 J1.4 ; v1(48.125,11.5) ccw(c48.089,11.536) 48.14,11.536 J1.5 ; v1(49.25,8.5) 48.292,7.542 ccw(c48.659,7.175) J1.4 ; v1(49.25,11.5) 48.292,12.458 cw(c48.659,12.825) J1.5
  other v1: 24.75,0.5 25.75,0.5 26.75,0.5 27.75,0.5 28.75,0.5 29.75,0.5 30.75,0.5 32,0.5 33.25,0.5 36.3,0.5 37.5,0.5 38.5,0.5 39.5,0.5 40.5,0.5 41.5,0.5 42.5,0.5 43.5,0.5 44.5,0.5 45.5,0.5 46.5,0.5 47.5,0.5 48.5,0.75 49.25,1.25 24.75,1.5 33.25,1.5 36.25,1.75 49.5,2.25 24.75,2.5 33.25,2.5 36.25,3 49.5,3.25 24.75,3.5 33.25,3.5 36.25,4 49.5,4.25 24.75,4.5 33.25,4.5 36.25,5 10.75,5.25 49.5,5.25 24.75,5.5 25.75,5.5 26.75,5.5 28.25,5.5 31.25,5.5 32.25,5.5 33.25,5.5 36.25,6 36.25,7 36.25,8 21,9.25 22.5,9.25 21,10.75 22.5,10.75 36.25,11 36.25,12 10.5,12.25 11.25,12.25 12,12.25 36.25,13 10.5,13.25 11.25,13.25 12,13.25 36.25,14 36.25,15 49.5,15 36.25,16 49.5,16 49.5,16.75 36.25,17 26,17.5 27,17.5 49.5,17.75 36.25,18 27,18.5 49.25,18.75 48.5,19.4 36.25,19.5 37.25,19.5 38.25,19.5 39.25,19.5 40.25,19.5 41.25,19.5 42.25,19.5 43.25,19.5 44.25,19.5 45.25,19.5 46.25,19.5 47.25,19.5
  other v2: 28.45,9.45 29.55,9.45 28.45,10.55 29.55,10.55
NetC2_1: C2.1 L1.1 | length 1.6
  L1 w0.254: L1.1 C2.1
NetC2_2: C2.2 C4.2 J1.1 | length 8.3
  L1 w0.254: C4.2 C2.2 42.93,11.47 44.4,10 J1.1
NetC6_2: C6.2 U1.19 | length 1.4
  L1 w0.254: C6.2 27.921,12.97 28.063,12.828 28.063,12.751 28.452,12.362 ; 28.452,12.361 28.454,12.359 28.454,12.33 28.5,12.284 28.5,11.946 U1.19@28.546,11.9
NetC17_2: C17.2 FB1.2 U4.3 | length 5.8
  L1 w0.5: FB1.2 10.65,15.908 11.308,15.25 C17.2 13.996,15.25 14,15.246 U4.3
NetD1_1: D1.1 R4.2 | length 2.4
  L1 w0.254: D1.1 R4.2
NetD1_2: D1.2 U2.8 | length 4.7
  L1 w0.254: U2.8 20,16.25 D1.2
NetD2_1: D2.1 R5.2 | length 1.9
  L1 w0.254: R5.2 D2.1
NetD2_2: D2.2 U2.9 | length 5.3
  L1 w0.254: D2.2 19.4,16.35 U2.9
NetD3_1: D3.1 R8.2 | length 1.7
  L1 w0.254: R8.2@31.32,18.5 D3.1
NetD3_2: D3.2 U2.10 | length 18.1
  L1 w0.254: v1(18.5,12.25) 18.538,12.212 18.538,11.95 18.965,11.523 19.377,11.523 U2.10 ; v1(31.75,17) D3.2
  L4 w0.254: v1(18.5,12.25) 19.454,13.204 19.454,13.635 21.017,15.198 24.617,15.198 25.571,16.152 30.902,16.152 v1(31.75,17)
NetF1_2: F1.2 FB1.1 | length 2.5
  L1 w0.5: F1.2 FB1.1
NetJ3_A5: J3.A5 R6.1 | length 2.9
  L1 w0.254: J3.A5 6.448,11.273 9.205,11.273 R6.1@9.25,11.318
NetJ3_B5: J3.B5 R7.1 | length 2.9
  L1 w0.254: J3.B5 6.448,8.227 9.205,8.227 R7.1
NetR1_1: R1.1 U2.31 | length 5.8
  L1 w0.254: U2.31 25.031,11.5 27,13.469 R1.1
NetR3_2: R3.2 U1.16 | length 2.4
  L1 w0.254: U1.16 30,12.171 31.254,13.425 31.457,13.425 R3.2
NRF_ANT1: L2.1 L3.2 U1.12 | length 11.4
  L1 w0.254: U1.12 31.542,9.5 31.742,9.3 37.7,9.3 38.75,8.25 L3.2 39.559,8.329 39.559,8.665 39.896,9.002 40.183,9.002 40.521,9.34 L2.1
NRF_ANT2: L1.2 L2.2 U1.13 | length 11.3
  L1 w0.254: U1.13 31.684,10 31.93,9.754 37.888,9.754 38.455,9.187 38.666,9.187 L2.2 39.469,10.01 39.469,11.99 L1.2
NRF_CE: U1.1 U2.30 | length 3
  L1 w0.254: U2.30 U1.1
NRF_IRQ: U1.6 U2.25 | length 4.4
  L1 w0.254: U2.25 24.25,8.5 25.08,7.67 26.324,7.67 26.754,8.1 U1.6
NRF_VDD_PA: C7.2 C8.2 L3.1 U1.11 | length 13.7
  L1 w0.254: U1.11 31.171,9 31.375,8.796 37,8.796 38.596,7.2 40.525,7.2 ; L3.1 40.525,8.245 40.525,7.2 ; C7.2 40.525,4.905 40.525,7.2
NRF_XC1: C3.1 R2.2 U1.10 U3.1 | length 6.8
  L1 w0.254: U1.10 30,5.153 30.223,4.93 30.223,3.501 U3.1 30.404,3.53 C3.1
NRF_XC2: C5.1 R2.1 U1.9 U3.3 | length 12
  L1 w0.254: U3.3 25.6,1.775 25.451,1.924 25.451,4.231 26.119,4.9 R2.1 29.5,5.041 U1.9
RSTN: C1.1 J2.5 U2.4 | length 31.9
  L1 w0.254: C1.1 6.51,2.76 9.41,2.76 J2.5 ; U2.4 22,13.348 22.5,13.848 v1(22.5,14.5)
  L4 w0.254: J2.5 9.63,2.54 9.63,1.67 10.1,1.2 20.6,1.2 23.052,3.652 23.052,13.948 v1(22.5,14.5)
SPI_CSN: U1.2 U2.29 | length 3
  L1 w0.254: U2.29 U1.2
SPI_MISO: U1.5 U2.27 | length 3.4
  L1 w0.254: U2.27 24.858,9.5 25.558,8.8 26.676,8.8 26.827,8.951 26.827,8.998 26.829,9 U1.5
SPI_MOSI: U1.4 U2.28 | length 3.4
  L1 w0.254: U2.28 25,10 25.746,9.254 26.254,9.254 26.5,9.5 U1.4
SPI_SCK: U1.3 U2.26 | length 4.9
  L1 w0.254: U2.26 24.123,8.977 24.739,8.977 25.456,8.259 25.749,8.259 v1(25.786,8.222) ; v1(26,9.806) 26.053,9.806 26.247,10 U1.3
  L4 w0.254: v1(25.786,8.222) 25.786,9.539 26,9.753 v1(26,9.806)
SWCLK: J2.3 U2.24 | length 15.8
  L1 w0.254: J2.3 14.5,1.5 15.25,0.75 20.25,0.75 23.5,4 U2.24
SWDIO: J2.2 U2.23 | length 11.5
  L1 w0.254: J2.2 18.54,1.25 20,1.25 23,4.25 U2.23
USB_CONN_D_N: CR1.4 J3.A7 J3.B7 | length 9.8
  L1 w0.169: J3.A7 6.359,9.815 5.732,9.815 5.565,9.982 5.565,10.518 5.732,10.685 6.359,10.685 J3.B7 6.49,10.685 7.014,10.685 8.515,10.684 10.516,8.684 11.229,8.684 11.799,9.255 12.44,9.255 CR1.4
USB_CONN_D_P: CR1.6 J3.A6 J3.B6 | length 9.8
  L1 w0.169: J3.B6 6.49,9.315 7.118,9.315 7.284,9.482 7.284,10.018 7.118,10.185 6.49,10.185 J3.A6 6.49,10.315 7.014,10.315 8.363,10.316 10.363,8.316 11.229,8.316 11.799,7.745 12.44,7.745 CR1.6
USB_D_N: CR1.3 U2.21 | length 10.9
  L1 w0.19: CR1.3 15.575,9.45 15.95,9.074 15.976,9.074 16.149,8.902 16.149,8.806 16.261,8.695 16.579,8.695 17.237,8.037 17.237,6.292 17.714,5.815 21.272,5.815 22.055,6.598 22.055,7.478 22.055,7.845 U2.21
USB_D_P: CR1.1 U2.22 | length 11.6
  L1 w0.19: CR1.1 15.575,7.55 15.95,7.926 15.976,7.926 16.149,8.098 16.149,8.194 16.261,8.305 16.418,8.305 16.847,7.875 16.847,6.13 17.553,5.425 21.433,5.425 22.445,6.437 22.445,7.478 22.445,7.845 U2.22
pads on no net: J3.A8 J3.B8 U2.2 U2.3 U2.6 U2.7 U2.11 U2.12 U2.13 U2.14 U2.15 U2.18 U2.19 U2.20

## Polygon pours and split planes (outlines as drawn)
GND on L1 "GND_L01_P012" (solid, remove dead copper, pour order 12): 0,0 0,20 34.75,20 34.75,10.25 30.5,10.25 30.5,8.75 29,8.75 29,6.25 23.75,6.25 23.75,0
GND on L1 "NONET_L-01_P-001" (solid, pour order 5): 48,0.1 ccw(c48,2.025) 49.925,2.025 49.925,5.7 49.117,5.7 49.117,2.329 cw(c47.571,2.329) 47.8,0.8 36.6,0.8 36.6,9.7 35.9,9.7 35.9,0.1
GND on L1 "NONET_L-01_P-001" (solid, pour order 3): 48,19.85 cw(c48,17.925) 49.925,17.925 49.925,14.25 49.117,14.25 49.117,17.621 ccw(c47.571,17.621) 47.8,19.15 36.6,19.15 36.6,10.25 35.9,10.25 35.9,19.85
GND on L1 "GND_L01_P002" (solid, remove dead copper, pour order 2): 28.6,5.8 28.6,5.2 25.1,5.2 25.1,0.8 32.9,0.8 32.9,5.2 30.9,5.2 30.9,5.8 33.6,5.8 33.6,0.2 24.4,0.2 24.4,5.8
+3V3 on L1 "+3V3_L01_P001" (solid, pour order 1): 14.8,13.5 17.9,13.5 18.1,13.3 18.1,11.6 17.9,11.4 14.9,11.4 14.6,11.7 14.6,13.3
no net on L1 "NONET_L01_P000" (solid, pour order 0): 9,11.9 9.1,11.8 13.3,11.8 13.4,11.9 13.4,13.3 13.2,13.5 10.6,13.5 10.3,13.8 10.3,15.7 10.1,15.9 9.2,15.9 9,15.7
GND on L2 "GND_L02_P008" (solid, pour order 8): 24.3,0 24.3,5.9 29.3,5.9 29.3,8.6 30.2,8.6 30.2,5.9 33.7,5.9 33.7,0
GND on L2 "GND_L02_P006" (solid, pour order 6): 23.8,0 23.8,6.2 28.9,6.2 29,6.2 29,8.8 30.6,8.8 30.6,6.2 34.2,6.2 34.2,0 50,0 50,20 0,20 0,0
GND on L4 "GND_L04_P009" (solid, pour order 9): 0,0 0,20 34,20 34,9 28.75,9 28.75,6.5 23.75,6.5 23.75,0
+3V3 on L3 "+3V3_L03_P011" (solid, pour order 11): 0,0 0,20 35,20 35,8.5 28.75,8.5 28.75,6.5 23.75,6.5 23.75,0

## Silkscreen, mask and mechanical layers (free items; w line width, h text height)
Top Overlay:
  text "Rx" at 16.4,16.9 h0.5
  text "Tx" at 21.65,16.9 h0.5
  text "USER" at 33.9,16.65 h0.5
  text "RSTN" at 8.15,0.4 h0.5
  text "GND" at 11.15,0.4 h0.5
  text "SWCLK" at 13.15,0.4 h0.5
  text "SWDIO" at 16.15,0.4 h0.5
  text "+3V3" at 19.15,0.4 h0.5
Bottom Overlay:
  text "RSTN" at 9.9,3.9 h0.5 r270
  text "GND" at 12.65,3.9 h0.5 r270
  text "SWCLK" at 15.15,3.65 h0.5 r270
  text "SWDIO" at 17.65,3.65 h0.5 r270
  text "+3V3" at 20.65,3.65 h0.5 r270
Mechanical 1:
  the board outline again, w0.254

## Text inside footprints (layer, text, board x,y; h text height)
CR1: Top 3D Body "*" at 14.813,8.322 h1.27 r180